# Altium PCB Thruster_driver_mark1.PcbDoc
Units mm, origin at the board's own origin, x right, y up, seen from the top; angles counter-clockwise.
Board outline 254.8 x 254.8 mm, 4 copper layers (Top Layer, Layer 1, Layer 2, Bottom Layer), stack 0.603 mm thick; 39 components, 56 nets, 206 pads, 0 vias.
Unrouted connection lines stored in the file: 106.
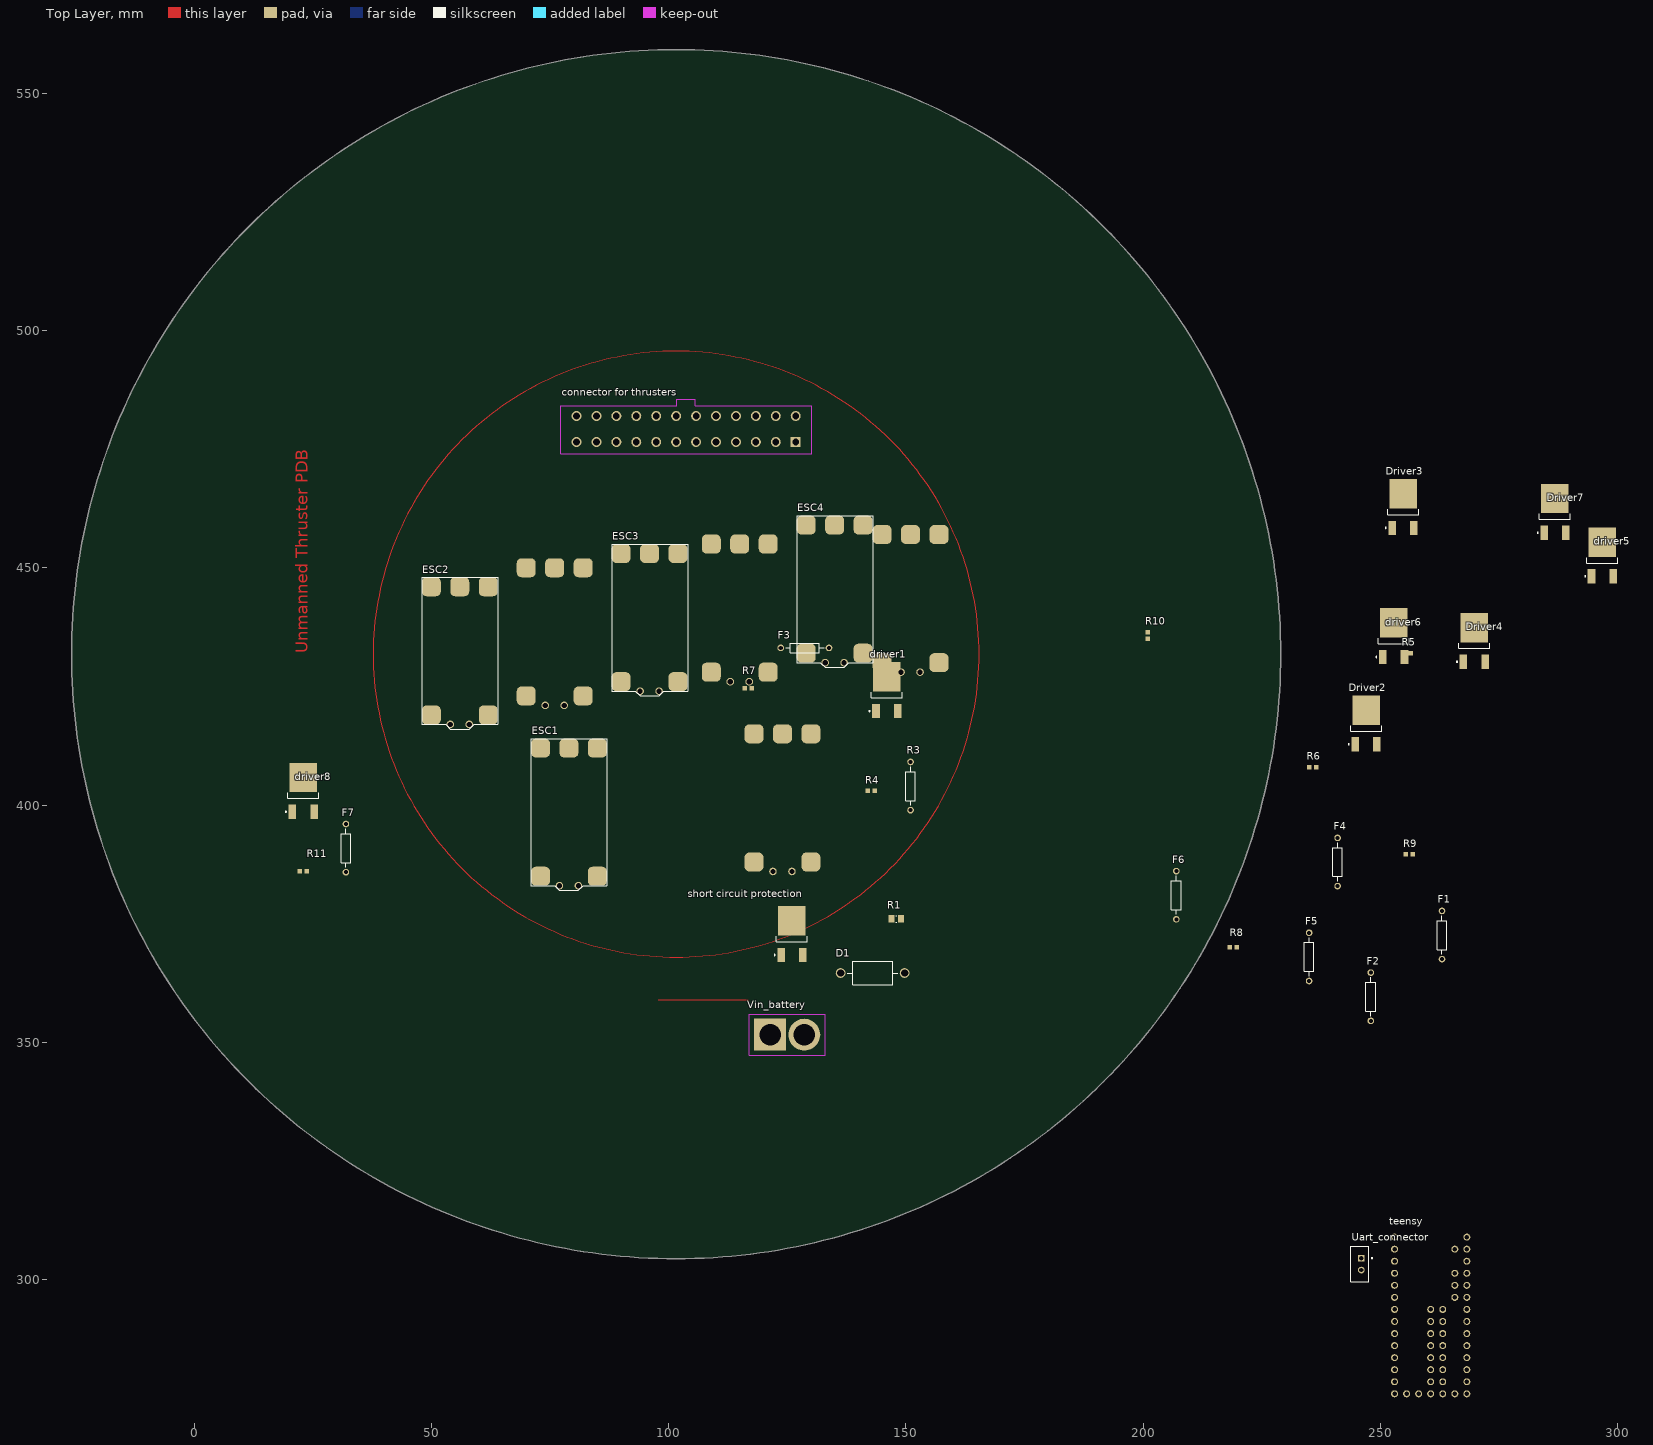
[diagram p0: Top Layer view]
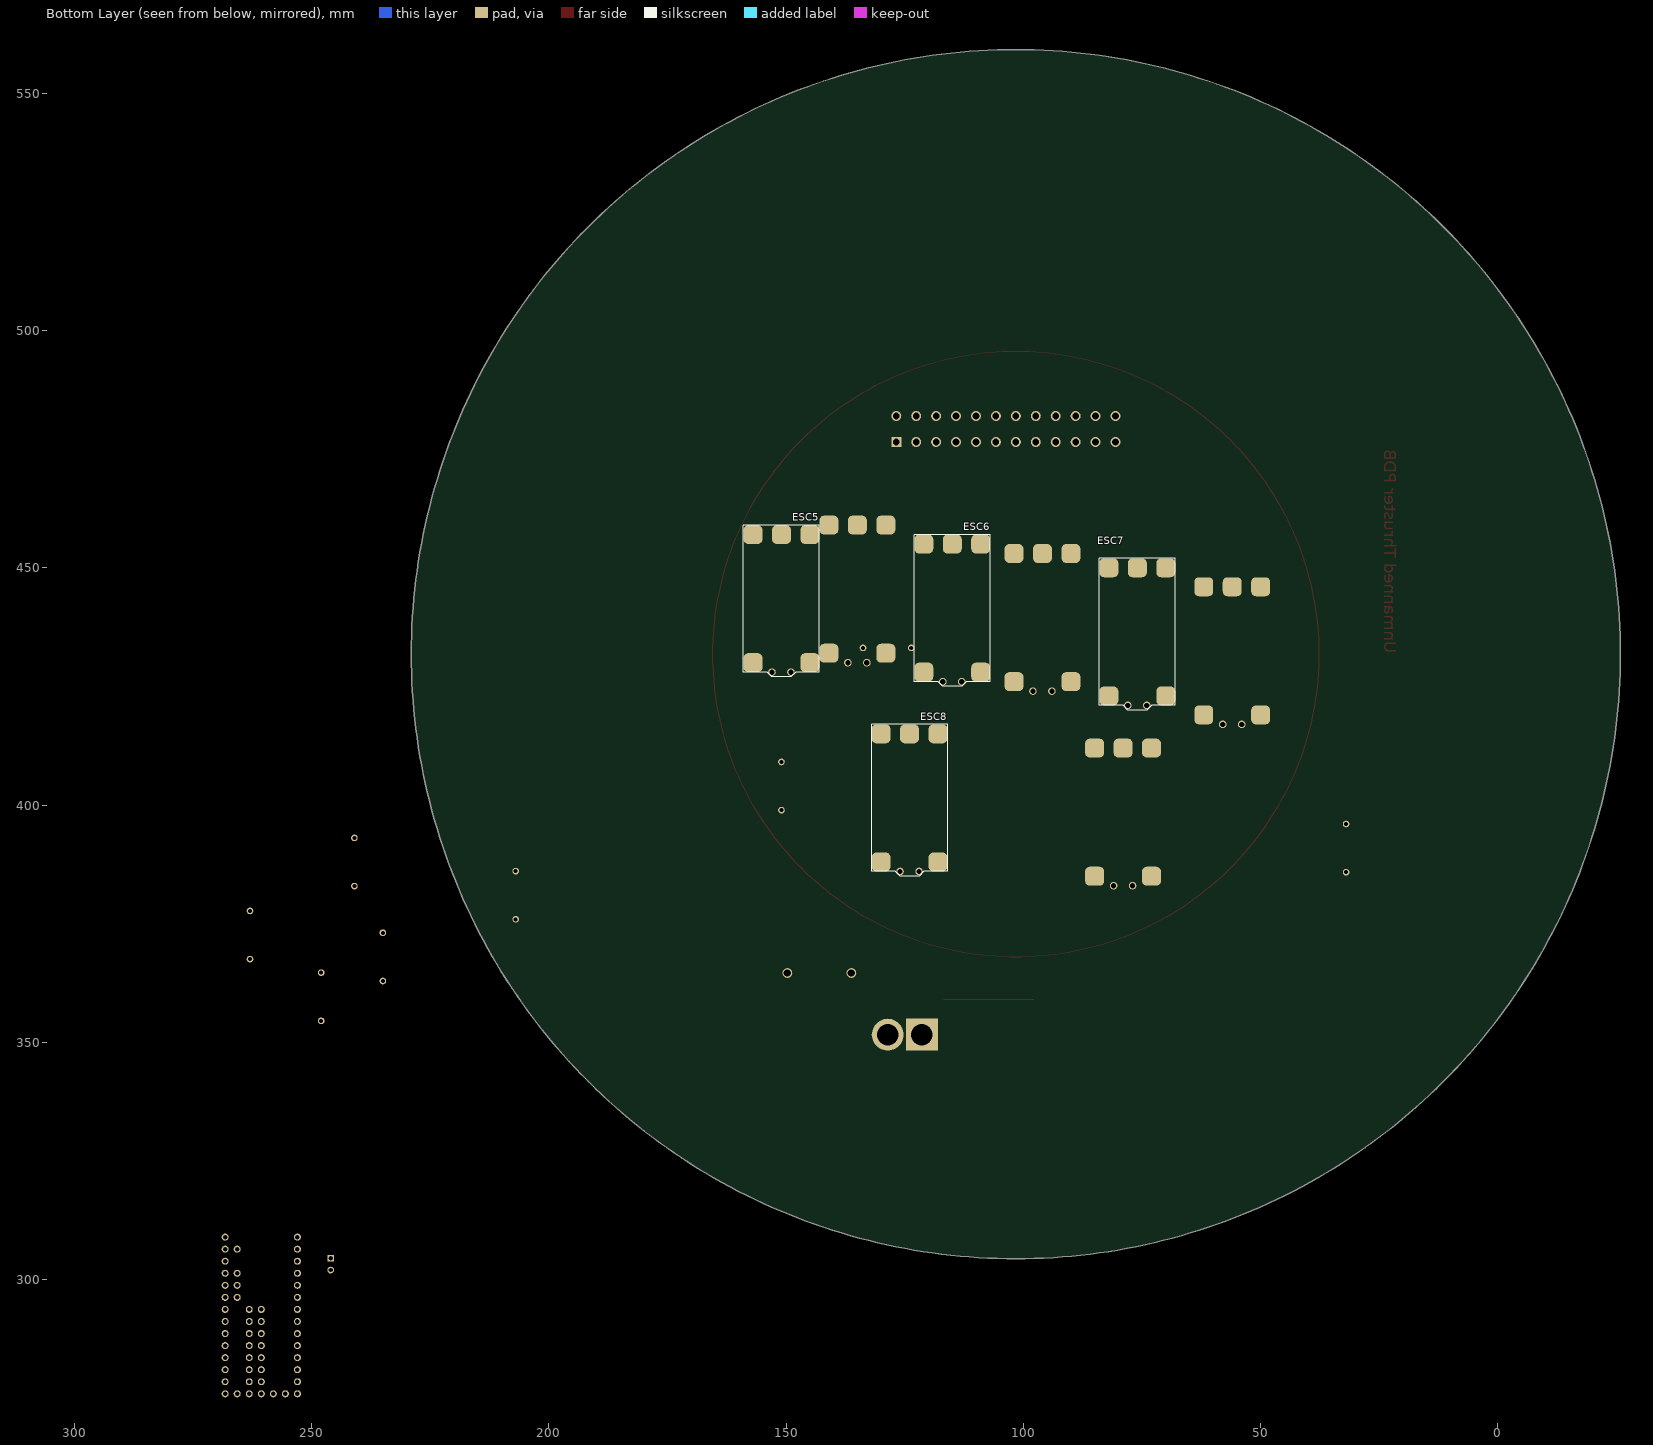
[diagram p1: Bottom Layer view, seen from below]
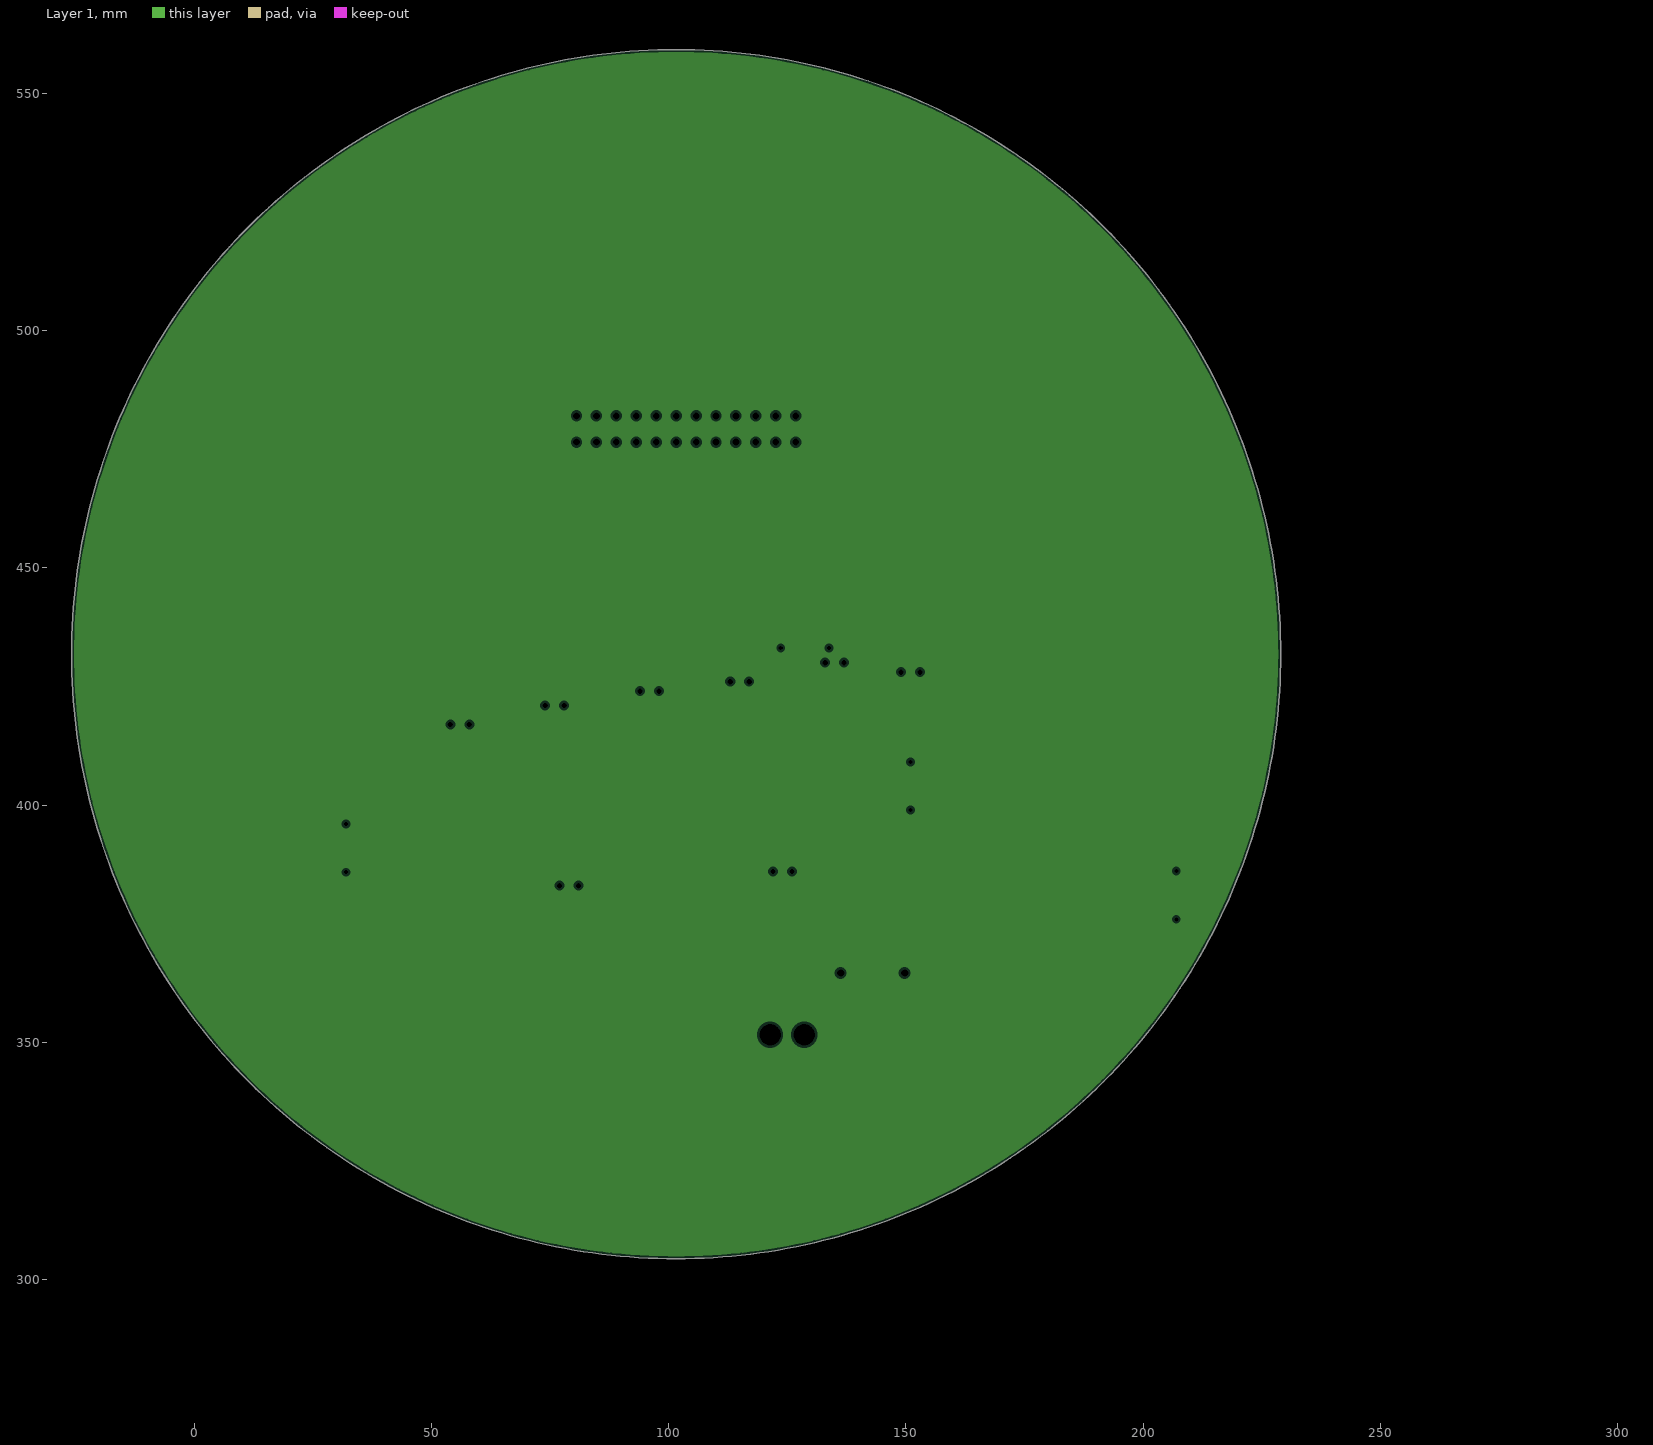
[diagram p2: Layer 1, clearances drawn from the general rule]
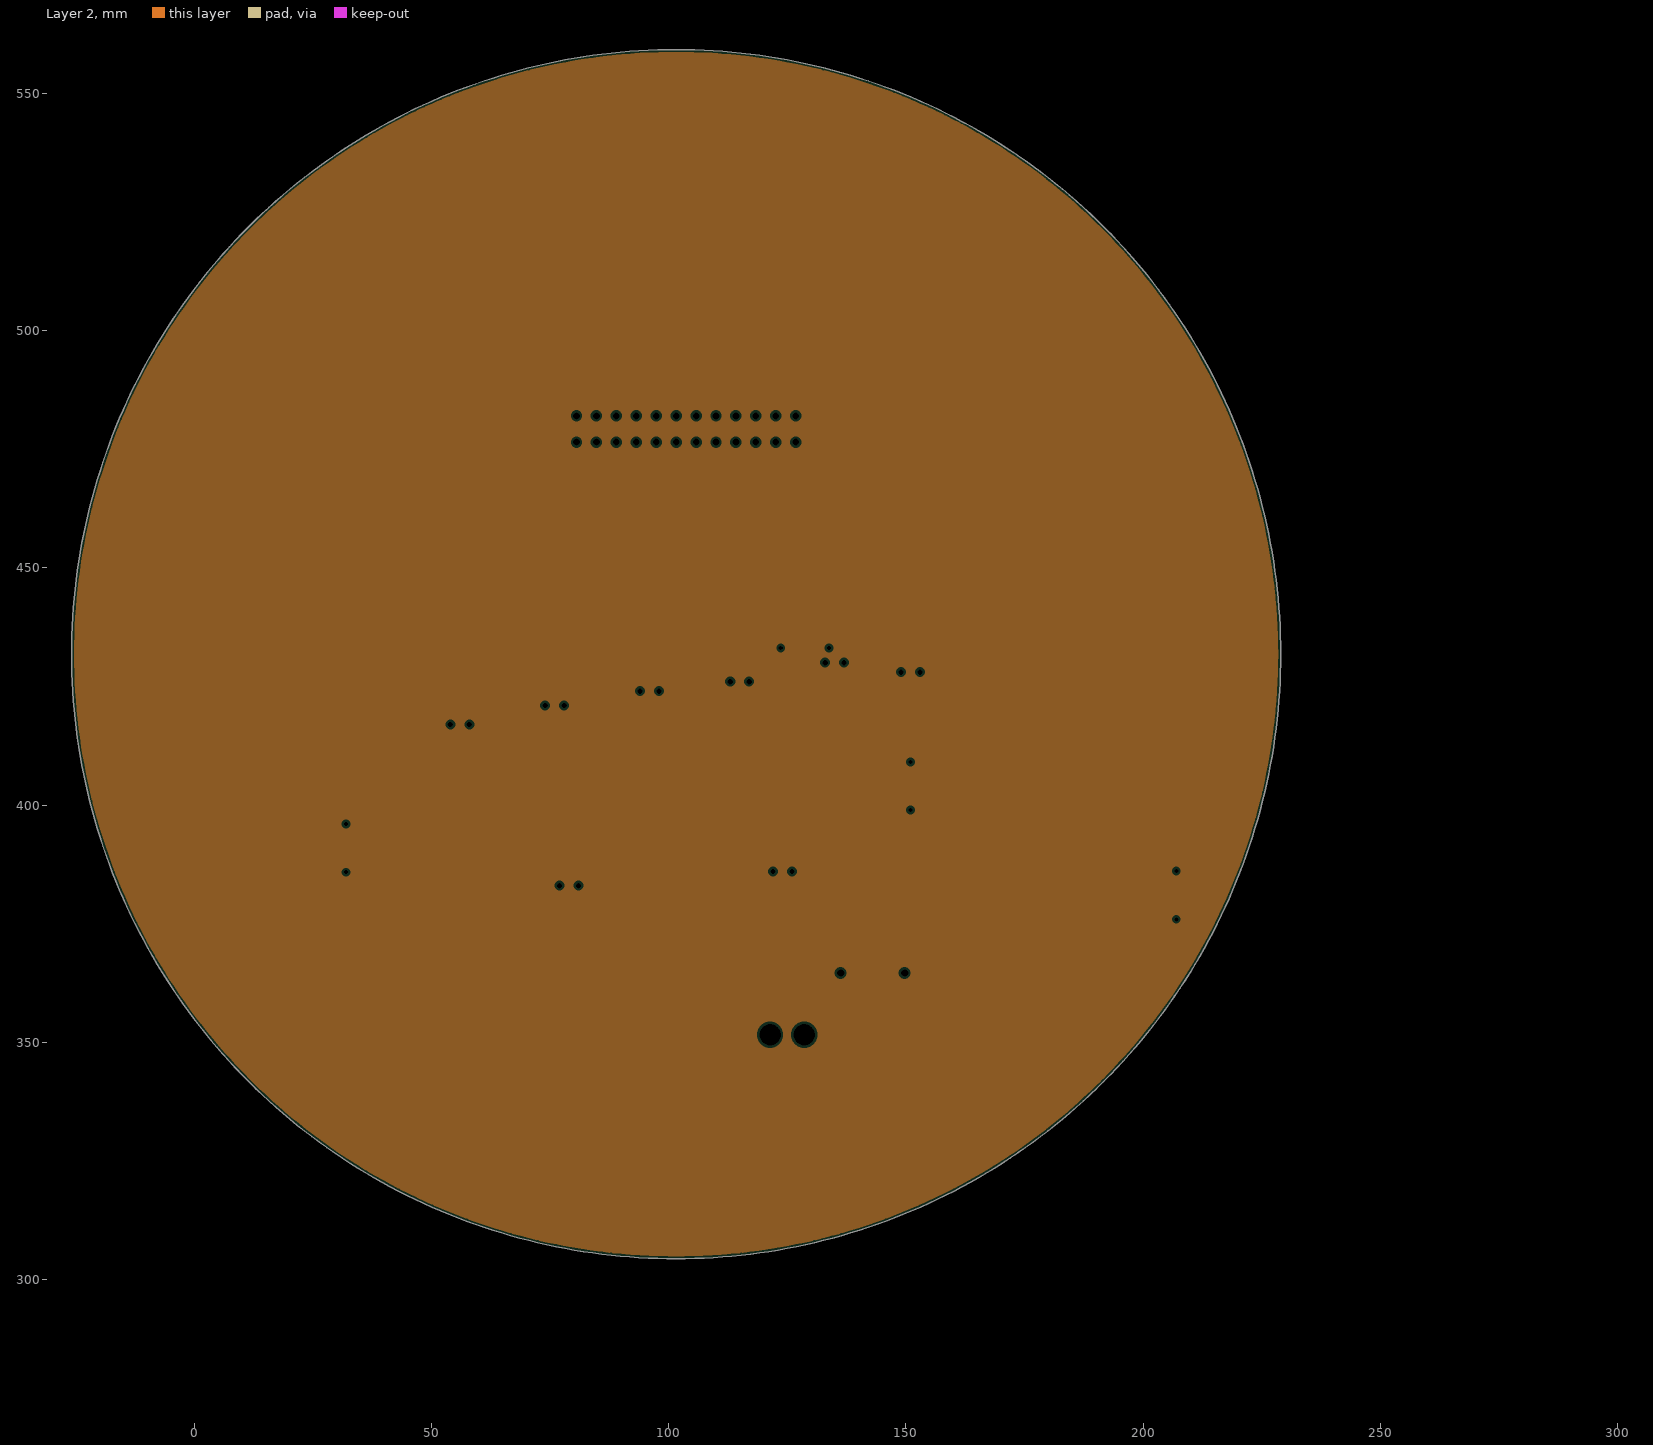
[diagram p3: Layer 2, clearances drawn from the general rule]

## Layer stack, top to bottom
Top Solder: solder mask 0.0102, Solder Resist, Dk 3.5
Top Layer: signal copper 0.0356
Dielectric 2: prepreg 0.0711, PP-006, Dk 4.1
Layer 1: plane copper 0.035
Dielectric 1: dielectric 0.32, FR-4, Dk 4.8
Layer 2: plane copper 0.035
Dielectric 3: prepreg 0.0711, PP-006, Dk 4.1
Bottom Layer: signal copper 0.0356
Bottom Solder: solder mask 0.0102, Solder Resist, Dk 3.5

## Board outline
101.6,304.4 cw(c101.6,431.8) -25.8,431.8 cw(c101.6,431.8) 101.6,559.2 cw(c101.6,431.8) 229,431.8 cw(c101.6,431.8)

## Design rules (kind name [scope] priority, off if disabled: settings)
Clearance [All] p1: gap=0.254 ignorepadtopadclearanceinfootprint=FALSE except(0: Arc-Hole Track-Hole SMDPad-Hole THPad-Hole Via-Hole Fill-Hole Poly-Hole Region-Hole Text-Hole)
PlaneClearance [All] p1: clearance=0.508
PlaneConnect [All] p1: planeconnectstyle=Relief reliefexpansion=0.508 reliefentries=4 reliefconductorwidth=0.254 reliefairgap=0.254
PolygonConnect [All] p1: connectstyle=Relief reliefconductorwidth=0.254 reliefentries=4 polygonreliefangle="90 Angle" airgapwidth=0.254
RoomDefinition thruster_driver_mark_1 [InComponentClass('thruster_driver_mark_1')] p1: confinementstyle=ConfineIn formatcopy=TRUE lockcomponents=FALSE outline 5,3 41,3 41,19.4 5,19.4
RoutingVias [All] p1: holewidth=0.711 width=1.27 viastyle="Through Hole" minholewidth=0.711 minwidth=1.27 maxholewidth=0.711 maxwidth=1.27
SolderMaskExpansion [All] p1: expansion=0.102
Width [All] p1: maxlimit=0.254 minlimit=0.254 preferedwidth=0.254
28 further rules are at their usual default settings.

## Components (designator, comment, footprint, x,y, rotation, side; value= is the part's Value field where it differs from the comment)
"connector for thrusters" "Conn Power HDR 24 POS 4.2mm Solder ST Thru-Hole 24 Terminal 1 Port Mini-Fit Jr" MOLEX_0039281243 126.8,476.5 r180 top
D1 "1N5822RLG" ONSC-AXIAL_LEAD-2-267-05_V 143,364.6 r180 top
driver1 "MOSFET" ONSC-DPAK-3-369C-01_V 146,424.2 r90 top
Driver2 "MOSFET" ONSC-DPAK-3-369C-01_V 247,417.2 r90 top
Driver3 "MOSFET" ONSC-DPAK-3-369C-01_V 254.8,462.8 r90 top
Driver4 "MOSFET" ONSC-DPAK-3-369C-01_V 269.8,434.6 r90 top
driver5 "MOSFET" ONSC-DPAK-3-369C-01_V 296.8,452.6 r90 top (schematic designator Driver5)
driver6 "MOSFET" ONSC-DPAK-3-369C-01_V 252.8,435.6 r90 top (schematic designator Driver6)
Driver7 "MOSFET" ONSC-DPAK-3-369C-01_V 286.8,461.8 r90 top
driver8 "MOSFET" ONSC-DPAK-3-369C-01_V 23,403 r90 top (schematic designator Driver8)
ESC1 "1*" PCBComponent_1#1 79,383 r0 top
ESC2 "1*" PCBComponent_1#2 56,417 r0 top
ESC3 "1*" PCBComponent_1#1 96,424 r0 top
ESC4 "1*" PCBComponent_1#1 135,430 r0 top
ESC5 "1*" PCBComponent_1#1 151,428 r180 bottom
ESC6 "1*" PCBComponent_1#1 115,426 r180 bottom
ESC7 "1*" PCBComponent_1#1 76,421 r180 bottom
ESC8 "1*" PCBComponent_1#1 124,386 r180 bottom
F1 "Res2" AXIAL-0.4 263,372.6 r90 top value=1K
F2 "Res2" AXIAL-0.4 248,359.6 r90 top value=1K
F3 "Res2" AXIAL-0.4 128.725,433.12 r180 top value=1K
F4 "Res2" AXIAL-0.4 241,388 r90 top value=1K
F5 "Res2" AXIAL-0.4 235,368 r90 top value=1K
F6 "Res2" AXIAL-0.4 207,381 r90 top value=1K
F7 "Res2" AXIAL-0.4 32,390.92 r90 top value=1K
R1 "1k" RESC2013X50X30ML20T20 148,376 r0 top
R3 "Res2" AXIAL-0.4 151,404 r90 top value=1K
R4 "10K" RESC1609X55X30NL10T20 142.725,403 r0 top
R5 "10K" RESC1609X55X30NL10T20 255.725,432 r0 top
R6 "10K" RESC1609X55X30NL10T20 235.725,408 r0 top
R7 "10K" RESC1609X55X30NL10T20 116.8,424.6 r0 top
R8 "10K" RESC1609X55X30NL10T20 219,370 r0 top
R9 "10K" RESC1609X55X30NL10T20 256.075,389.6 r0 top
R10 "10K" RESC1609X55X30NL10T20 201,435.725 r90 top
R11 "10K" RESC1609X55X30NL10T20 23,386 r0 top
"short circuit protection" "MOSFET" ONSC-DPAK-3-369C-01_V 126,372.8 r90 top
teensy "Footprint for Teensy 3.1 or 3.2 board using all pads and all through-holes. Pads need a 2x7 0.1\" SMD header." TEENSY_3.0-3.2_ALL_PINS_&_PADS 260.62,292.43 r0 top
Uart_connector "B2B-EH-A" JST-B2B-EH-A_V 245.7,303.25 r270 top
Vin_battery "DC supply; XT60" AMASS_XT60-M 125,351.6 r0 top

## Footprints (in the part's own frame and the unit in brackets; to place one, negate y for a bottom-side part, rotate by r counter-clockwise, add the part's x,y. Pads: shape width x height; smd on the part's side, far side on the other; paste and mask are expansions set on the pad)
AMASS_XT60-M [mm]
  rect 6.75x6.75 / inner rect 1.524x1.524 / far side rect 6.75x6.75 hole 4.5: 1(-3.6,0)
  round 6.75 / inner round 1.524 / far side round 6.75 hole 4.5: 2(3.6,0)
  Top Layer keep-out lines w0.05: -8,-4.3 8,-4.3 8,4.3 -8,4.3 -8,-4.3
AXIAL-0.4 [mm] "Axial Device, Thru-Hole; 2 Leads; 0.4 in Pin Spacing"
  round 1.4 hole 0.85: 1(-5.08,0) 2(5.08,0)
  silkscreen extent -4.06,-1.02 4.06,1.02
JST-B2B-EH-A_V [mm] "THD, 2-Leads, Body 7.5x3.8mm, Pitch 2.5mm"
  rect 1.4x1.4 hole 0.9: 1(-1.25,0.3)
  round 1.4 hole 0.9: 2(1.25,0.3)
  silkscreen extent -3.75,-1.9 3.75,2.68, body extent -3.75,-1.9 3.75,1.9, height 6
MOLEX_0039281243 [mm]
  rect 2.1x2.1 / inner rect 1.524x1.524 / far side rect 2.1x2.1 hole 1.4: 1(0,0)
  round 2.1 / inner round 1.524 / far side round 2.1 hole 1.4: 2(4.2,0) 3(8.4,0) 4(12.6,0) 5(16.8,0) 6(21,0) 7(25.2,0) 8(29.4,0) 9(33.6,0) 10(37.8,0) 11(42,0) 12(46.2,0) 13(0,-5.5) 14(4.2,-5.5) 15(8.4,-5.5) 16(12.6,-5.5) 17(16.8,-5.5) 18(21,-5.5) 19(25.2,-5.5) 20(29.4,-5.5) 21(33.6,-5.5) 22(37.8,-5.5) 23(42,-5.5) 24(46.2,-5.5)
  Top Layer keep-out lines w0.05: 49.55,2.5 49.55,-7.6 25.05,-7.6 25.05,-9 21.15,-9 21.15,-7.6 -3.35,-7.6 -3.35,2.5 49.55,2.5
ONSC-AXIAL_LEAD-2-267-05_V [mm] "AXIAL, 2-Leads, Diameter 5.05mm"
  round 2.05 hole 1.55: 1(-6.745,0) 2(6.745,0)
  silkscreen extent -5.32,-2.52 5.32,2.52
ONSC-DPAK-3-369C-01_V [mm] "DPAK, 3-Leads, Body 6.54x6.095mm, Pitch 2.29mm"
  rect 3x1.6 smd: 1(-4.4,2.29) 3(-4.4,-2.29)
  rect 6.2x5.8 smd: 4(2.8,0)
  silkscreen extent -4.52,-3.27 -0.45,3.76, body extent -1.6,-3.27 4.49,3.27, height 2.38
PCBComponent_1#1 [mm]
  round 1.6 hole 1.1: 0(-2,0) 1(2,0)
  rrect50% 4x4 all layers, no hole: 2(-6,2) 3(6,2) 4(-6,29) 4(-6,29) 5(0,29) 6(6,29)
  silkscreen extent -8,-1 8,31
PCBComponent_1#2 [mm]
  round 1.6 hole 1.1: 0(-2,0) 1(2,0)
  rrect50% 4x4 all layers, no hole: 2(-6,2) 3(6,2) 4(-6,29) 5(0,29) 6(6,29)
  rrect50% 4x4 smd: 4(-6,29)
  silkscreen extent -8,-1 8,31
RESC1609X55X30NL10T20 [mm] "Chip Resistor, 2-Leads, Body 1.60x0.85mm, IPC Medium Density"
  rect 0.95x0.95 smd: 1(-0.725,0) 2(0.725,0)
  body extent -0.85,-0.48 0.85,0.48, height 0.55
RESC2013X50X30ML20T20 [mm] "Chip Resistor, 2-Leads, Body 2.00x1.25mm, IPC Low Density"
  rect 1.25x1.55 smd: 1(-1.025,0) 2(1.025,0)
  silkscreen extent -0.1,-0.67 0.1,0.67, body extent -1.1,-0.72 1.1,0.72, height 0.5
TEENSY_3.0-3.2_ALL_PINS_&_PADS [mil]
  round 58 / inner round 60 / far side round 58 hole 38: 0(-300,550) 1(-300,450) 2(-300,350) 3(-300,250) 3.3V(300,450) 3.3V1(-100,-650) 3.3V2(100,-50) 4(-300,150) 5(-300,50) 6(-300,-50) 7(-300,-150) 8(-300,-250) 9(-300,-350) 10(-300,-450) 11(-300,-550) 12(-300,-650) 13(300,-650) 14/A0(300,-550) 15/A1(300,-450) 16/A2(300,-350) 17/A3(300,-250) 18/A4(300,-150) 19/A5(300,-50) 20/A6(300,50) 21/A7(300,150) 22/A8(300,250) 23/A9(300,350) 24(0,-150) 25(0,-250) 26(0,-350) 27(0,-450) 28(0,-550) 29(100,-550) 30(100,-450) 31(100,-350) 32(100,-250) 33(100,-150) A10(200,250) A11(200,150) A12(0,50) A13(100,50) AGND(300,550) AREF(200,350) GND(-300,650) GND1(0,-650) GND2(0,-50) PGM(100,-650) RESET/DAC(200,-650) VBAT(-200,-650) VIN(300,650) VUSB(200,550)

## Part data
"connector for thrusters": library part 0039281243, Package=None, DeviceSetName=0039281243, DIGI-KEY_PART_NUMBER=WM3811-ND, DIGI-KEY_PURCHASE_URL=https://www.digikey.com/product-detail/en/molex/0039281243/WM3811-ND/356033?utm_source=snapeda&utm_medium=aggregator&utm_campaign=symbol, GateName_1=G$1, LibraryName=0039281243, MF=Molex, MP=0039281243, SymbolName_1=0039281243
D1: library part CMP-1055-00010-1, "Rectifier, 2-Pin Axial_Lead, Pb-Free, Tape and Reel", Manufacturer="On Semiconductor", ComponentLink1Description="Manufacturer URL", ComponentLink1URL=http://www.onsemi.com/, ComponentLink2Description=Datasheet, ComponentLink2URL=http://www.onsemi.cn/pub_link/Collateral/1N5820-D.PDF, ComponentLink3Description="Package Specification", ComponentLink3URL=http://www.onsemi.com/pub_link/Collateral/267-05.PDF, Configuration=Single, DatasheetVersion="Rev. 10", IFSM Max (A)=80, Mounting Technology="Through Hole", PackageDescription="2-Pin, Axial Lead, Diameter 5.05 mm", PackageReference=AXIAL_LEAD-2-267-05, PackageVersion="Rev. G, 06/2000", Packing="Tape and Reel", PartNumber=1N5822RLG, RoHS=TRUE
driver1 Driver2 Driver3 Driver4 driver5 driver6 Driver7 driver8 "short circuit protection": library part CMP-1058-00407-1, "Power MOSFET -60 V, -15.5 A, Single P-Channel, 3-Pin DPAK, Pb-Free, Tape and Reel", Manufacturer="On Semiconductor", Package Type=DPAK-3, PartNumber=NTD20P06LT4G, Channel Polarity="P Channel", Ciss Typ (pF)=740, ComponentLink1Description="Manufacturer URL", ComponentLink1URL=http://www.onsemi.com/, ComponentLink2Description=Datasheet, ComponentLink2URL=http://www.onsemi.cn/pub_link/Collateral/NTD20P06L-D.PDF, ComponentLink3Description="Package Specification", ComponentLink3URL=http://www.onsemi.cn/pub_link/Collateral/369C.PDF, Configuration=Single, Coss Typ (pF)=207, Crss Typ (pF)=66, DatasheetVersion="Rev. 6", ID Max (A)=15.5, Mounting Technology="Surface Mount", PackageDescription="3-Pin Flange Mount, Body 6.54 x 6.095 mm, Pitch 2.29 mm", PackageReference=DPAK-3-369C-01, PackageVersion="Rev. E, 02/2014", Packing="Tape and Reel", PD Max (W)=65, Qrr Typ (nC)=0.13, RoHS=Pb-Free, V(BR)DSS Min (V)=60, VGS(th) Max (V)=2, VGS Max (V)=20
ESC1 ESC2 ESC4 ESC5 ESC6 ESC7 ESC8: "this is just a footprint made for the esc to allow a interface, where the esc can be on the board"
ESC3: library part ESC_1, "this is just a footprint made for the esc to allow a interface, where the esc can be on the board"
F1 F2 F3 F4 F5 F6 F7 R3: "Resistor", LatestRevisionDate=17-Jul-2002, LatestRevisionNote="Re-released for DXP Platform.", PackageDescription="Axial Device, Thru-Hole; 2 Leads; 0.4 in Pin Spacing", PackageReference=AXIAL-0.4, Published=8-Jun-2000, Publisher="Altium Limited"
R1: library part CMP-2001-03598-1, Manufacturer="Vishay Dale", Part Number=CRCW08051K00JNTA
R4 R5 R6 R7 R8 R9 R10 R11: library part CMP-2000-03691-1, Manufacturer="Vishay Dale", Part Number=TNPW060310K0BEEA
teensy: library part TEENSY_3.1-3.2_ALL_PINS&PADS, Package=TEENSY_3.0-3.2_ALL_PINS_&_PADS, DeviceSetName=TEENSY_3.1-3.2_ALL_PINS&PADS, GateName_1=G$1, LibraryName=Teensy_3_and_LC_Series_Boards_v1.4, SymbolName_1=TEENSY_3.1-3.2_ALL_PINS_AND_PADS
Uart_connector: library part CMP-2000-05887-1, "Male Header, Pitch 2.5 mm, 1 x 2 Position, Height 6 mm, Tail Length 3.2 mm, -25 to 85 degC, RoHS, Bulk", Color=Natural, Manufacturer=JST, Package Description="Male Header, Pitch 2.5 mm, 1 x 2 Position, Height 6 mm, Tail Length 3.2 mm", Standard Package=1,000, Category=Connectors,Interconnects, Connector Type=Header,Shrouded, Contact Finish=Tin-Lead, Contact Finish Thickness=-, Contact Mating Length="0.130\"(3.30mm)", Contact Type=MalePin, Datasheet URL=http://media.digikey.com/pdf/Data%20Sheets/JST%20PDFs/EH%20Series.pdf, Datasheet Version=10/2002, Family=RectangularConnectors-Headers,MalePins, Fastening Type=DetentLock, Features=-, Manufacturer URL=http://www.jst.com/home2.html, Mating Products=455-1000-ND-CONNHOUSINGEH2POS2.5MMCRIMP455-2933-ND-CONNRECEPTHR2POS2.5MMBLACK455-2934-ND-CONNRECEPTHR2POS2.5MMWHITE455-1044-ND-CONNRECEPTHR2POS2.5MMWHITE455-1057-ND-CONNRECEPTHR2POS2.5MMBLACK, Mounting Technology=ThroughHole, Mounting Type=ThroughHole, Number of Positions=2, Number of Positions Loaded=All, Number of Rows=1, Other Names=455-1014, Package Reference=B2B-EH-A, Packaging=Bulk, Pitch="0.098\"(2.50mm)", Row Spacing=-, Series=EH, Termination=Press-Fit
Vin_battery: library part XT60-M, Package="Package Analog Devices", AVAILABILITY=Unavailable, DeviceSetName=XT60-M, GateName_1=G$1, LibraryName=XT60-M, MF=AMASS, MP=XT60-M, PRICE=None, SymbolName_1=XT60-M

## Nets (pads, with @x,y where several pads share a name; then routed paths per layer and width w, separated by ;. In a path a pad name is that pad's centre, name@x,y a point inside that pad or via, vN(x,y) a via of type N, cw(c..) or ccw(c..) an arc to the next point about the centre after c; other vN are vias at no path point)
GND: "short circuit protection.1" ESC1.2 ESC2.2 ESC3.2 ESC4.2 ESC5.2 ESC6.2 ESC7.2 ESC8.2 Vin_battery.1 | length 19
  Top Layer w0.254: 97.849,359 116.8,359
"Netconnector for thrusters_1": "connector for thrusters.1" ESC5.4
"Netconnector for thrusters_2": "connector for thrusters.2" ESC5.5
"Netconnector for thrusters_3": "connector for thrusters.3" ESC5.6
"Netconnector for thrusters_4": "connector for thrusters.4" ESC6.4
"Netconnector for thrusters_5": "connector for thrusters.5" ESC6.5
"Netconnector for thrusters_6": "connector for thrusters.6" ESC6.6
"Netconnector for thrusters_7": "connector for thrusters.7" ESC7.4
"Netconnector for thrusters_8": "connector for thrusters.8" ESC7.5
"Netconnector for thrusters_9": "connector for thrusters.9" ESC7.6
"Netconnector for thrusters_10": "connector for thrusters.10" ESC8.4
"Netconnector for thrusters_11": "connector for thrusters.11" ESC8.5
"Netconnector for thrusters_12": "connector for thrusters.12" ESC8.6
"Netconnector for thrusters_13": "connector for thrusters.13" ESC4.6
"Netconnector for thrusters_14": "connector for thrusters.14" ESC4.5
"Netconnector for thrusters_15": "connector for thrusters.15" ESC4.4
"Netconnector for thrusters_16": "connector for thrusters.16" ESC3.6
"Netconnector for thrusters_17": "connector for thrusters.17" ESC3.5
"Netconnector for thrusters_18": "connector for thrusters.18" ESC3.4
"Netconnector for thrusters_19": "connector for thrusters.19" ESC2.6
"Netconnector for thrusters_20": "connector for thrusters.20" ESC2.5
"Netconnector for thrusters_21": "connector for thrusters.21" ESC2.4
"Netconnector for thrusters_22": "connector for thrusters.22" ESC1.6
"Netconnector for thrusters_23": "connector for thrusters.23" ESC1.5
"Netconnector for thrusters_24": "connector for thrusters.24" ESC1.4
NetD1_1: D1.1 R1.2
NetD1_2: D1.2 Vin_battery.2
Netdriver1_1: driver1.1 Driver2.1 Driver3.1 Driver4.1 driver5.1 driver6.1 Driver7.1 driver8.1 R4.1 R5.1 R6.1 R7.1 R8.1 R9.1 R10.1 R11.1 teensy.VIN
Netdriver1_3: driver1.3 driver1.4 ESC1.3 R3.2 R4.2
NetDriver2_3: Driver2.3 F1.2 R5.2
NetDriver2_4: Driver2.4 ESC2.3
NetDriver3_3: Driver3.3 F2.2 R6.2
NetDriver3_4: Driver3.4 ESC3.3
NetDriver4_3: Driver4.3 F3.2 R7.2
NetDriver4_4: Driver4.4 ESC4.3
Netdriver5_3: driver5.3 F4.2 R8.2
NetDriver5_4: driver5.4 ESC5.3
Netdriver6_3: driver6.3 F5.2 R9.2
NetDriver6_4: driver6.4 ESC6.3
NetDriver7_3: Driver7.3 F6.2 R10.2
NetDriver7_4: Driver7.4 ESC7.3
Netdriver8_3: driver8.3 F7.2 R11.2
NetDriver8_4: driver8.4 ESC8.3
NetESC1_0: ESC1.0 ESC2.0 ESC3.0 ESC4.0 ESC5.0 ESC6.0 ESC7.0 ESC8.0 teensy.GND teensy.GND1 teensy.GND2
NetESC1_1: ESC1.1 teensy.5
NetESC2_1: ESC2.1 teensy.6
NetESC3_1: ESC3.1 teensy.9
NetESC4_1: ESC4.1 teensy.10
NetESC5_1: ESC5.1 teensy.20/A6
NetESC6_1: ESC6.1 teensy.22/A8
NetESC7_1: ESC7.1 teensy.21/A7
NetESC8_1: ESC8.1 teensy.23/A9
NetF1_1: "short circuit protection.3" F1.1 F2.1 F3.1 F4.1 F5.1 F6.1 F7.1 R3.1
NetR1_1: "short circuit protection.4" R1.1
Netteensy_3: teensy.3 Uart_connector.1
Netteensy_4: teensy.4 Uart_connector.2
pads on no net: teensy.0 teensy.1 teensy.2 teensy.3.3V teensy.3.3V1 teensy.3.3V2 teensy.7 teensy.8 teensy.11 teensy.12 teensy.13 teensy.14/A0 teensy.15/A1 teensy.16/A2 teensy.17/A3 teensy.18/A4 teensy.19/A5 teensy.24 teensy.25 teensy.26 teensy.27 teensy.28 teensy.29 teensy.30 teensy.31 teensy.32 teensy.33 teensy.A10 teensy.A11 teensy.A12 teensy.A13 teensy.AGND teensy.AREF teensy.PGM teensy.RESET/DAC teensy.VBAT teensy.VUSB
copper on no net: | length 401.2
  Top Layer w0.254: 165.45,431.8 ccw(c101.6,431.8) 165.45,431.8

## Polygon pours and split planes (outlines as drawn)
no net on Layer 1 (split plane): 513 vertices, not listed, extent -25.292,304.908 228.492,558.692
no net on Layer 2 (split plane): 513 vertices, not listed, extent -25.292,304.908 228.492,558.692

## Other copper
Top Layer:
  pour cut-out: 109,440
  text "Unmanned Thruster PDB" at 24,432 h2.52 r90